# EAGLE board axiom_beta_sensor_cmv12000_v0.9 (EAGLE 7.0.0), part 1 of 2
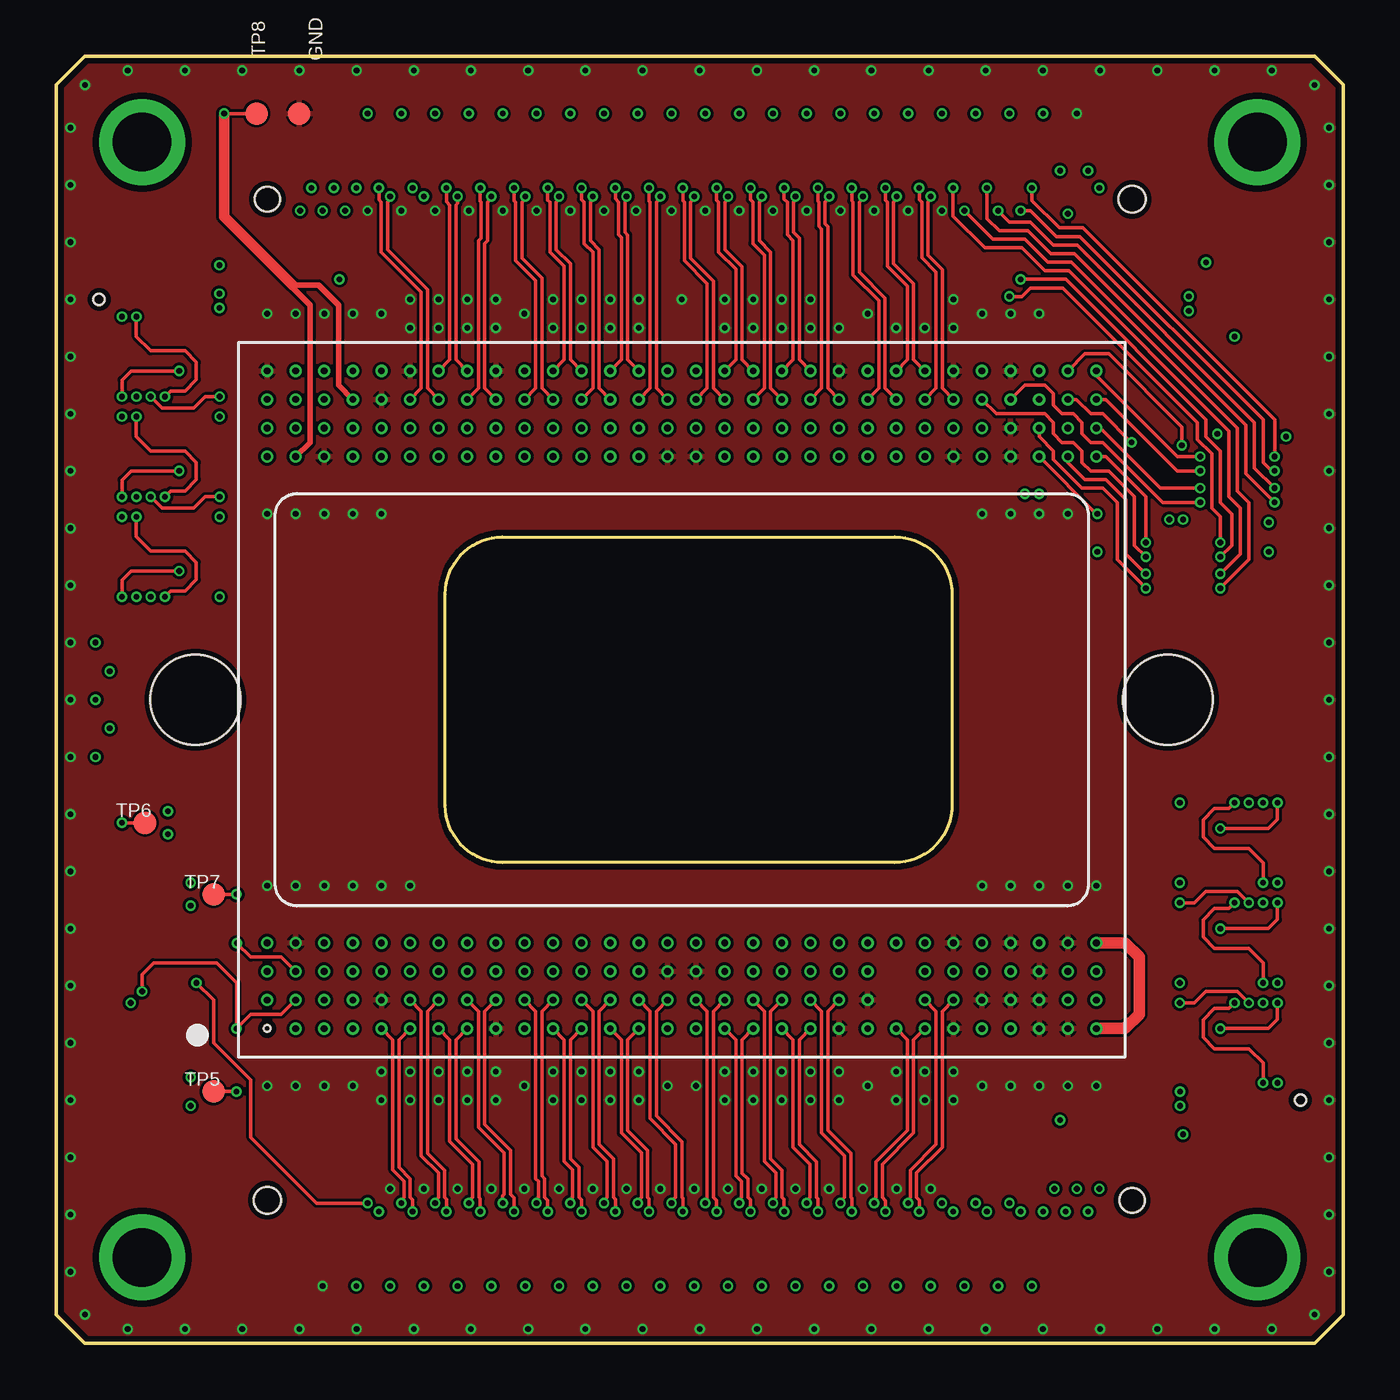
[diagram p0: board, top side]
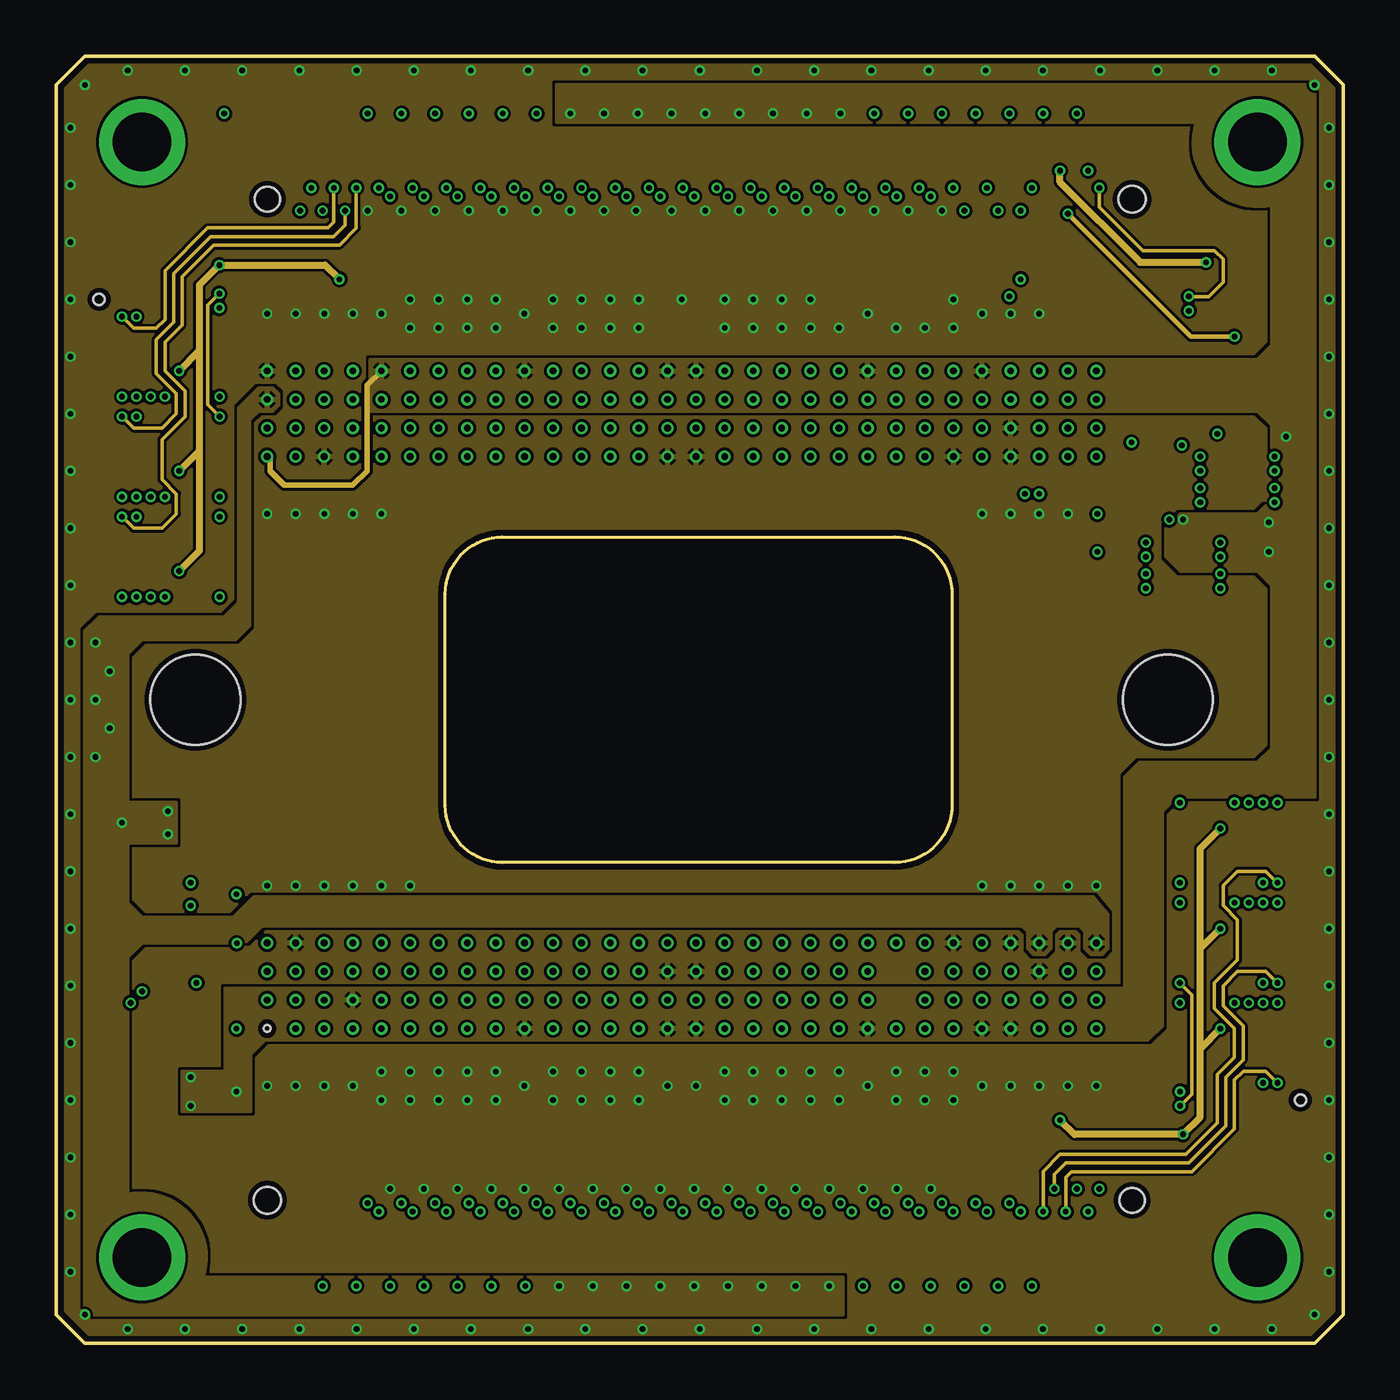
[diagram p1: board, inner layer Route2]
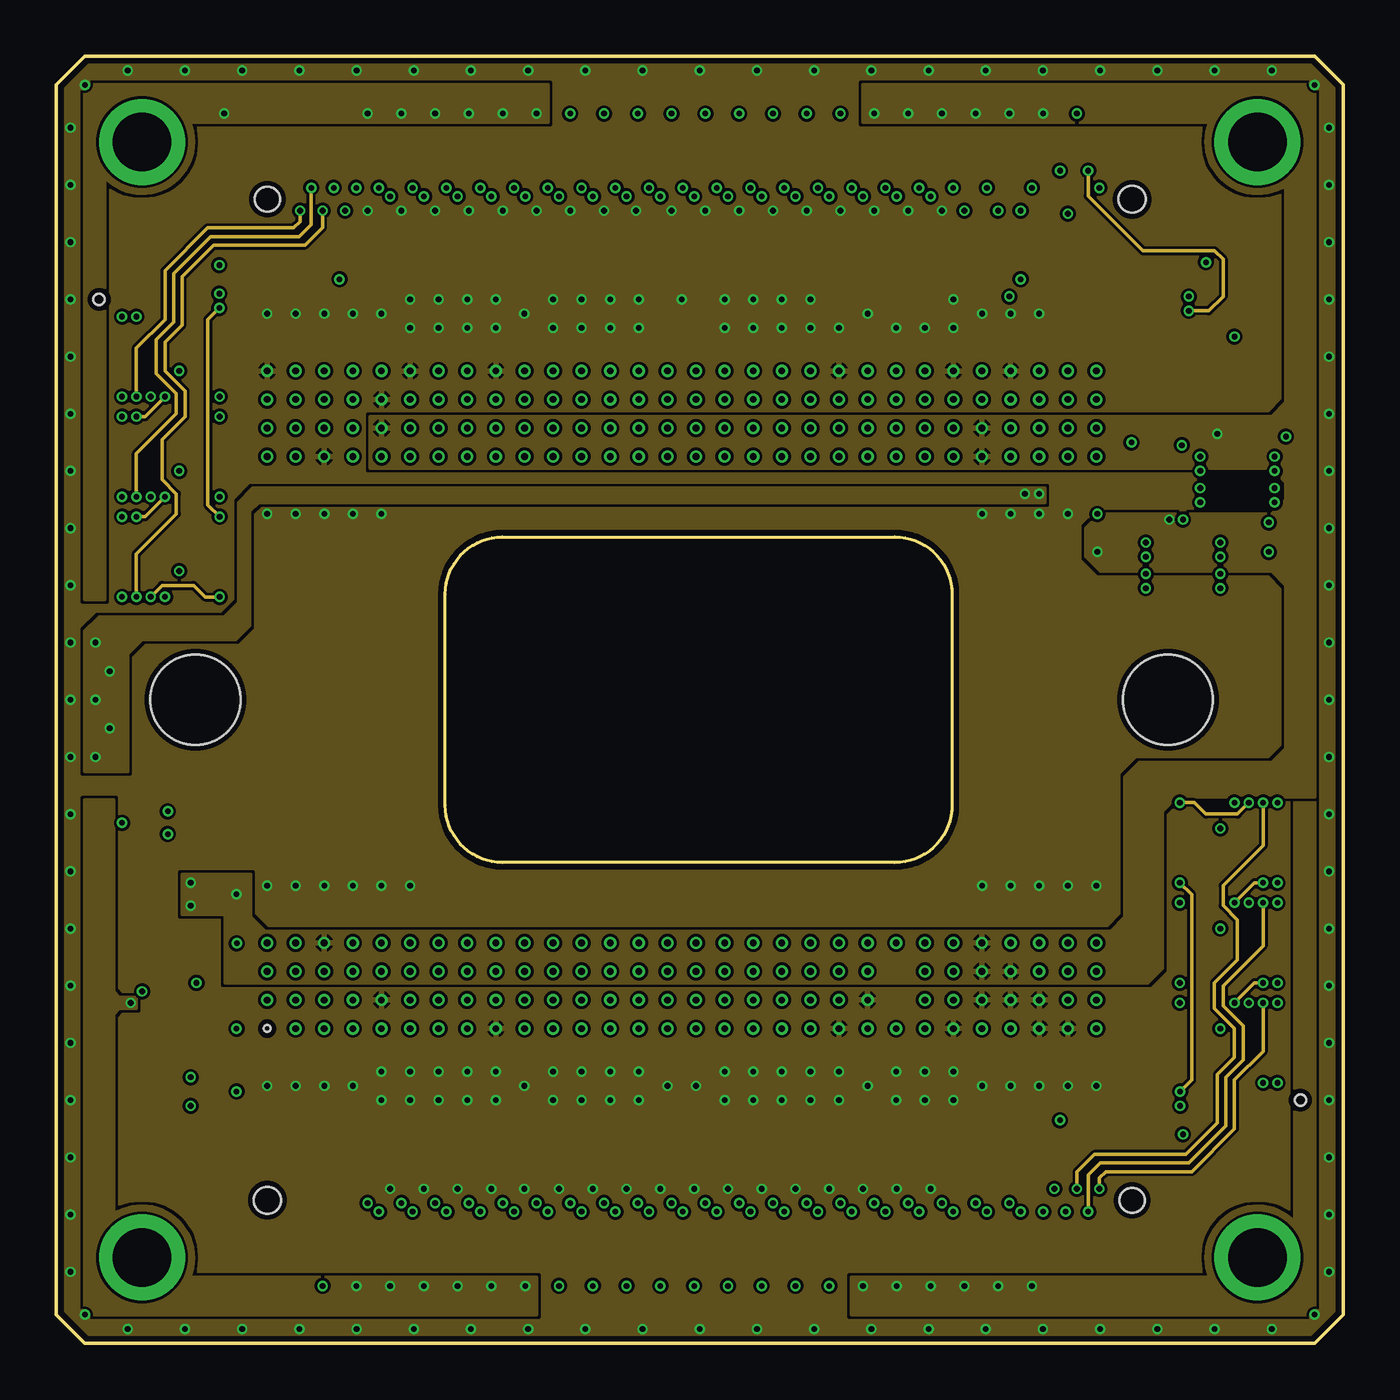
[diagram p2: board, inner layer Route15]
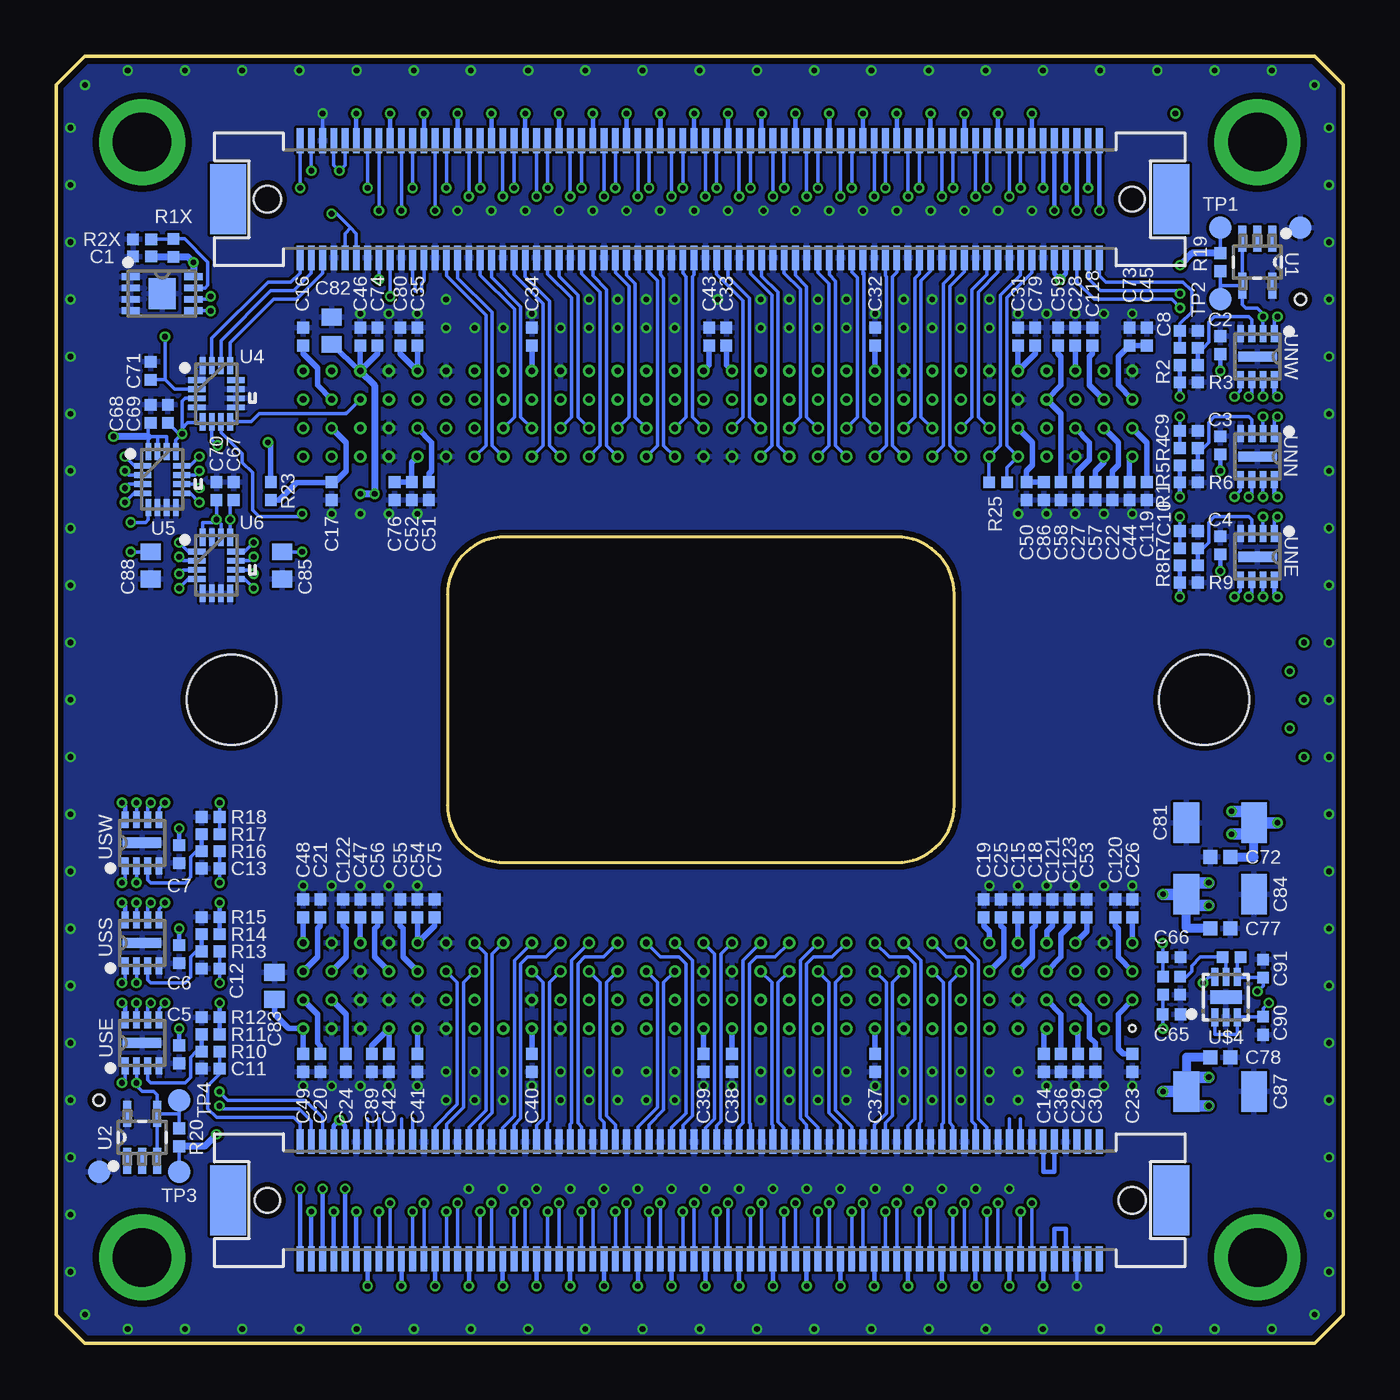
[diagram p3: board, bottom side, seen from below]

Size 57.15 x 57.15 mm. Coordinates in mm from the lower left corner, seen from the top.
Outline: 55.88,57.15 1.27,57.15 0,55.88 0,1.27 1.27,0 55.88,0 57.15,1.27 57.15,55.88 55.88,57.15
Outline: 37.23,21.34 19.81,21.34 arc-90 17.27,23.88 17.27,33.27 arc-90 19.81,35.8 37.23,35.8 arc-90 39.77,33.27 39.77,23.88 arc-90 37.23,21.34
Copper layers (1*2*15*16): Top 0.035559375mm / dielectric 0.17018125mm / Route2 0.01778125mm / dielectric 47mil / Route15 0.01778125mm / dielectric 0.17018125mm / Bottom 0.035559375mm
Design rules "axiom_beta_interface_OSHPark-4layer-tuned *": minimum track width 5mil, minimum drill 10mil, track to track 5mil, track to pad 5mil, pad to pad 5mil, via to via 5mil, smd to smd 5mil, copper to edge 10mil, drill to drill 6mil, minimum pad ring 4mil, minimum via ring 4mil, stop-mask expansion 2mil, vias tented up to drill 15mil, thermal gap 5mil
Net classes: 0 default: width 0.152 mm, drill 0.254 mm; 1 power: width 0.152 mm, drill 0.254 mm
Holes 4 mm at 49.36,28.57 6.18,28.57
Holes 0.5 mm at 1.9,46.36 55.25,10.79
bKeepout: area 1.4,24.8 to 13.4,32.4; area 43.9,24.8 to 56,32.4
tRestrict: area 51.1,1.6 to 55.5,6; area 1.6,51.1 to 6,55.5; area 51.1,51.1 to 55.5,55.5; area 1.6,1.6 to 6,6
bRestrict: area 51.1,1.6 to 55.5,6; area 1.6,51.1 to 6,55.5; area 51.1,51.1 to 55.5,55.5; area 1.6,1.6 to 6,6

## Footprints (pad centres in the part's own frame; a part is rotated, then mirrored left to right if it is on the bottom)
0402-C = smd 0.52 x 0.52: 1 -0.4,0; 2 0.4,0
0402-B = smd 0.62 x 0.62: 1 -0.45,0; 2 0.45,0
1206-B = smd 1.15 x 1.8: 1 -1.5,0; 2 1.5,0
0603-C = smd 0.75 x 0.9: 1 -0.6,0; 2 0.6,0
TP10R = smd 1 x 1: TP 0,0
SOT65P210X110-5N = smd 1.168 x 0.356: 1 -1.041,0.66; 2 -1.041,0; 3 -1.041,-0.66; 4 1.041,-0.66; 5 1.041,0.66
QFN40P185X265X55-16N = smd 0.762 x 0.254: 1 -0.864,0.61; 2 -0.864,0.203; 3 -0.864,-0.203; 4 -0.864,-0.61; 9 0.864,-0.61; 10 0.864,-0.203; 11 0.864,0.203; 12 0.864,0.61 | smd 0.254 x 0.762: 5 -0.61,-1.245; 6 -0.203,-1.245; 7 0.203,-1.245; 8 0.61,-1.245; 13 0.61,1.245; 14 0.203,1.245; 15 -0.203,1.245; 16 -0.61,1.245
10-30-07-237-400T4 = drill 0.3: A2 -17.945,-14.605; A3 -16.675,-14.605; A4 -15.405,-14.605; A5 -14.135,-14.605; A6 -12.865,-14.605; A7 -11.595,-14.605; A8 -10.325,-14.605; A9 -9.055,-14.605; A10 -7.785,-14.605; A11 -6.515,-14.605; A12 -5.245,-14.605; A13 -3.975,-14.605; A14 -2.705,-14.605; A15 -1.435,-14.605; A16 -0.165,-14.605; A17 1.105,-14.605; A18 2.375,-14.605; A19 3.645,-14.605; A20 4.915,-14.605; A21 6.185,-14.605; A22 7.455,-14.605; A23 8.725,-14.605; A24 9.995,-14.605; A25 11.265,-14.605; A26 12.535,-14.605; A27 13.805,-14.605; A28 15.075,-14.605; A29 16.345,-14.605; A30 17.615,-14.605; B1 -19.215,-13.335; B2 -17.945,-13.335; B3 -16.675,-13.335; B4 -15.405,-13.335; B5 -14.135,-13.335; B6 -12.865,-13.335; B7 -11.595,-13.335; B8 -10.325,-13.335; B9 -9.055,-13.335; B10 -7.785,-13.335; B11 -6.515,-13.335; B12 -5.245,-13.335; B13 -3.975,-13.335; B14 -2.705,-13.335; B15 -1.435,-13.335; B16 -0.165,-13.335; B17 1.105,-13.335; B18 2.375,-13.335; B19 3.645,-13.335; B20 4.915,-13.335; B21 6.185,-13.335; B22 7.455,-13.335; B24 9.995,-13.335; B25 11.265,-13.335; B26 12.535,-13.335; B27 13.805,-13.335; B28 15.075,-13.335; B29 16.345,-13.335; B30 17.615,-13.335; C1 -19.215,-12.065; C2 -17.945,-12.065; C3 -16.675,-12.065; C4 -15.405,-12.065; C5 -14.135,-12.065; C6 -12.865,-12.065; C7 -11.595,-12.065; C8 -10.325,-12.065; C9 -9.055,-12.065; C10 -7.785,-12.065; C11 -6.515,-12.065; C12 -5.245,-12.065; C13 -3.975,-12.065; C14 -2.705,-12.065; C15 -1.435,-12.065; C16 -0.165,-12.065; C17 1.105,-12.065; C18 2.375,-12.065; C19 3.645,-12.065; C20 4.915,-12.065; C21 6.185,-12.065; C22 7.455,-12.065; C24 9.995,-12.065; C25 11.265,-12.065; C26 12.535,-12.065; C27 13.805,-12.065; C28 15.075,-12.065; C29 16.345,-12.065; C30 17.615,-12.065; D1 -19.215,-10.795; D2 -17.945,-10.795; D3 -16.675,-10.795; D4 -15.405,-10.795; D5 -14.135,-10.795; D6 -12.865,-10.795; D7 -11.595,-10.795; D8 -10.325,-10.795; D9 -9.055,-10.795; D10 -7.785,-10.795; D11 -6.515,-10.795; D12 -5.245,-10.795; D13 -3.975,-10.795; D14 -2.705,-10.795; D15 -1.435,-10.795; D16 -0.165,-10.795; D17 1.105,-10.795; D18 2.375,-10.795; D19 3.645,-10.795; D20 4.915,-10.795; D21 6.185,-10.795; D22 7.455,-10.795; D23 8.725,-10.795; D24 9.995,-10.795; D25 11.265,-10.795; D26 12.535,-10.795; D27 13.805,-10.795; D28 15.075,-10.795; D29 16.345,-10.795; D30 17.615,-10.795; E1 -19.215,10.795; E2 -17.945,10.795; E3 -16.675,10.795; E4 -15.405,10.795; E5 -14.135,10.795; E6 -12.865,10.795; E7 -11.595,10.795; E8 -10.325,10.795; E9 -9.055,10.795; E10 -7.785,10.795; E11 -6.515,10.795; E12 -5.245,10.795; E13 -3.975,10.795; E14 -2.705,10.795; E15 -1.435,10.795; E16 -0.165,10.795; E17 1.105,10.795; E18 2.375,10.795; E19 3.645,10.795; E20 4.915,10.795; E21 6.185,10.795; E22 7.455,10.795; E23 8.725,10.795; E24 9.995,10.795; E25 11.265,10.795; E26 12.535,10.795; E27 13.805,10.795; E28 15.075,10.795; E29 16.345,10.795; E30 17.615,10.795; F1 -19.215,12.065; F2 -17.945,12.065; F3 -16.675,12.065; F4 -15.405,12.065; F5 -14.135,12.065; F6 -12.865,12.065; F7 -11.595,12.065; F8 -10.325,12.065; F9 -9.055,12.065; F10 -7.785,12.065; F11 -6.515,12.065; F12 -5.245,12.065; F13 -3.975,12.065; F14 -2.705,12.065; F15 -1.435,12.065; F16 -0.165,12.065; F17 1.105,12.065; F18 2.375,12.065; F19 3.645,12.065; F20 4.915,12.065; F21 6.185,12.065; F22 7.455,12.065; F23 8.725,12.065; F24 9.995,12.065; F25 11.265,12.065; F26 12.535,12.065; F27 13.805,12.065; F28 15.075,12.065; F29 16.345,12.065; F30 17.615,12.065; G1 -19.215,13.335; G2 -17.945,13.335; G3 -16.675,13.335; G4 -15.405,13.335; G5 -14.135,13.335; G6 -12.865,13.335; G7 -11.595,13.335; G8 -10.325,13.335; G9 -9.055,13.335; G10 -7.785,13.335; G11 -6.515,13.335; G12 -5.245,13.335; G13 -3.975,13.335; G14 -2.705,13.335; G15 -1.435,13.335; G16 -0.165,13.335; G17 1.105,13.335; G18 2.375,13.335; G19 3.645,13.335; G20 4.915,13.335; G21 6.185,13.335; G22 7.455,13.335; G23 8.725,13.335; G24 9.995,13.335; G25 11.265,13.335; G26 12.535,13.335; G27 13.805,13.335; G28 15.075,13.335; G29 16.345,13.335; G30 17.615,13.335; H1 -19.215,14.605; H2 -17.945,14.605; H3 -16.675,14.605; H4 -15.405,14.605; H5 -14.135,14.605; H6 -12.865,14.605; H7 -11.595,14.605; H8 -10.325,14.605; H9 -9.055,14.605; H10 -7.785,14.605; H11 -6.515,14.605; H12 -5.245,14.605; H13 -3.975,14.605; H14 -2.705,14.605; H15 -1.435,14.605; H16 -0.165,14.605; H17 1.105,14.605; H18 2.375,14.605; H19 3.645,14.605; H20 4.915,14.605; H21 6.185,14.605; H22 7.455,14.605; H23 8.725,14.605; H24 9.995,14.605; H25 11.265,14.605; H26 12.535,14.605; H27 13.805,14.605; H28 15.075,14.605; H29 16.345,14.605; H30 17.615,14.605 | hole 0.3: -19.215,-14.605
MLF-6 = smd 0.3 x 0.8: 1 -0.5,-0.9; 2 0,-0.9; 3 0.5,-0.9; 4 0.5,0.9; 5 0,0.9; 6 -0.5,0.9 | smd 1.4 x 0.6: EP 0,0
DFN200X300X100-9N = smd 0.813 x 0.305: 1 -1.397,0.762; 2 -1.397,0.254; 3 -1.397,-0.254; 4 -1.397,-0.762; 5 1.397,-0.762; 6 1.397,-0.254; 7 1.397,0.254; 8 1.397,0.762 | smd 1.194 x 1.397: EP 0,0
DFN200X200X100-9N = smd 0.75 x 0.3: 1 -1.025,0.75; 2 -1.025,0.25; 3 -1.025,-0.25; 4 -1.025,-0.75; 5 1.025,-0.75; 6 1.025,-0.25; 7 1.025,0.25; 8 1.025,0.75 | smd 0.45 x 1.7: EP 0,0
FX10A-144P = smd 0.3 x 1.1: 1 -17.75,-2.6; 2 -17.75,2.6; 3 -17.25,-2.6; 4 -17.25,2.6; 5 -16.75,-2.6; 6 -16.75,2.6; 7 -16.25,-2.6; 8 -16.25,2.6; 9 -15.75,-2.6; 10 -15.75,2.6; 11 -15.25,-2.6; 12 -15.25,2.6; 13 -14.75,-2.6; 14 -14.75,2.6; 15 -14.25,-2.6; 16 -14.25,2.6; 17 -13.75,-2.6; 18 -13.75,2.6; 19 -13.25,-2.6; 20 -13.25,2.6; 21 -12.75,-2.6; 22 -12.75,2.6; 23 -12.25,-2.6; 24 -12.25,2.6; 25 -11.75,-2.6; 26 -11.75,2.6; 27 -11.25,-2.6; 28 -11.25,2.6; 29 -10.75,-2.6; 30 -10.75,2.6; 31 -10.25,-2.6; 32 -10.25,2.6; 33 -9.75,-2.6; 34 -9.75,2.6; 35 -9.25,-2.6; 36 -9.25,2.6; 37 -8.75,-2.6; 38 -8.75,2.6; 39 -8.25,-2.6; 40 -8.25,2.6; 41 -7.75,-2.6; 42 -7.75,2.6; 43 -7.25,-2.6; 44 -7.25,2.6; 45 -6.75,-2.6; 46 -6.75,2.6; 47 -6.25,-2.6; 48 -6.25,2.6; 49 -5.75,-2.6; 50 -5.75,2.6; 51 -5.25,-2.6; 52 -5.25,2.6; 53 -4.75,-2.6; 54 -4.75,2.6; 55 -4.25,-2.6; 56 -4.25,2.6; 57 -3.75,-2.6; 58 -3.75,2.6; 59 -3.25,-2.6; 60 -3.25,2.6; 61 -2.75,-2.6; 62 -2.75,2.6; 63 -2.25,-2.6; 64 -2.25,2.6; 65 -1.75,-2.6; 66 -1.75,2.6; 67 -1.25,-2.6; 68 -1.25,2.6; 69 -0.75,-2.6; 70 -0.75,2.6; 71 -0.25,-2.6; 72 -0.25,2.6; 73 0.25,-2.6; 74 0.25,2.6; 75 0.75,-2.6; 76 0.75,2.6; 77 1.25,-2.6; 78 1.25,2.6; 79 1.75,-2.6; 80 1.75,2.6; 81 2.25,-2.6; 82 2.25,2.6; 83 2.75,-2.6; 84 2.75,2.6; 85 3.25,-2.6; 86 3.25,2.6; 87 3.75,-2.6; 88 3.75,2.6; 89 4.25,-2.6; 90 4.25,2.6; 91 4.75,-2.6; 92 4.75,2.6; 93 5.25,-2.6; 94 5.25,2.6; 95 5.75,-2.6; 96 5.75,2.6; 97 6.25,-2.6; 98 6.25,2.6; 99 6.75,-2.6; 100 6.75,2.6; 101 7.25,-2.6; 102 7.25,2.6; 103 7.75,-2.6; 104 7.75,2.6; 105 8.25,-2.6; 106 8.25,2.6; 107 8.75,-2.6; 108 8.75,2.6; 109 9.25,-2.6; 110 9.25,2.6; 111 9.75,-2.6; 112 9.75,2.6; 113 10.25,-2.6; 114 10.25,2.6; 115 10.75,-2.6; 116 10.75,2.6; 117 11.25,-2.6; 118 11.25,2.6; 119 11.75,-2.6; 120 11.75,2.6; 121 12.25,-2.6; 122 12.25,2.6; 123 12.75,-2.6; 124 12.75,2.6; 125 13.25,-2.6; 126 13.25,2.6; 127 13.75,-2.6; 128 13.75,2.6; 129 14.25,-2.6; 130 14.25,2.6; 131 14.75,-2.6; 132 14.75,2.6; 133 15.25,-2.6; 134 15.25,2.6; 135 15.75,-2.6; 136 15.75,2.6; 137 16.25,-2.6; 138 16.25,2.6; 139 16.75,-2.6; 140 16.75,2.6; 141 17.25,-2.6; 142 17.25,2.6; 143 17.75,-2.6; 144 17.75,2.6 | smd 1.6 x 3.1: M1 -20.95,0; M2 20.95,0 | hole 1.1: -19.2,0 | hole 1.2: 19.2,0

## Placement (x,y rotation side)
C1  100n  [0402-C]  53.34,48.26 180 bottom
C2  100n  [0402-C]  5.46,44.32 90 bottom
C3  100n  [0402-C]  5.46,39.88 90 bottom
C4  100n  [0402-C]  5.46,35.43 90 bottom
C5  100n  [0402-C]  51.69,12.83 270 bottom
C6  100n  [0402-C]  51.69,17.27 270 bottom
C7  100n  [0402-C]  51.69,21.72 270 bottom
C8  1µ  [0402-C]  6.86,44.96 0 bottom
C9  1µ  [0402-C]  6.86,40.51 0 bottom
C10  1µ  [0402-C]  6.86,36.07 0 bottom
C11  1µ  [0402-C]  50.29,12.19 180 bottom
C12  1µ  [0402-C]  50.29,16.64 180 bottom
C13  1µ  [0402-C]  50.29,21.08 180 bottom
C14  100n  [0402-C]  13.3,12.45 270 bottom
C15  100n  [0402-C]  14.44,19.3 90 bottom
C16  100n  [0402-C]  46.19,44.7 90 bottom
C17  100n  [0402-C]  44.92,37.85 270 bottom
C18  100n  [0402-C]  13.68,19.3 90 bottom
C19  100n  [0402-C]  15.96,19.3 90 bottom
C20  100n  [0402-C]  45.43,12.45 270 bottom
C21  100n  [0402-C]  45.43,19.3 90 bottom
C22  100n  [0402-C]  10.25,37.85 90 bottom
C23  100n  [0402-C]  9.36,12.45 90 bottom
C24  100n  [0402-C]  44.28,12.45 90 bottom
C25  100n  [0402-C]  15.2,19.3 270 bottom
C26  100n  [0402-C]  9.36,19.3 270 bottom
C27  100n  [0402-C]  11.77,37.85 90 bottom
C28  100n  [0402-C]  11.9,44.7 270 bottom
C29  100n  [0402-C]  11.77,12.45 270 bottom
C30  100n  [0402-C]  11.01,12.45 270 bottom
C31  100n  [0402-C]  14.44,44.7 90 bottom
C32  100n  [0402-C]  20.79,44.7 90 bottom
C33  100n  [0402-C]  27.39,44.7 90 bottom
C34  100n  [0402-C]  36.03,44.7 90 bottom
C35  100n  [0402-C]  41.11,44.7 90 bottom
C36  100n  [0402-C]  12.54,12.45 270 bottom
C37  100n  [0402-C]  20.79,12.45 270 bottom
C38  100n  [0402-C]  27.14,12.45 270 bottom
C39  100n  [0402-C]  28.41,12.45 270 bottom
C40  100n  [0402-C]  36.03,12.45 270 bottom
C41  100n  [0402-C]  41.11,12.45 270 bottom
C42  100n  [0402-C]  42.38,12.45 270 bottom
C43  100n  [0402-C]  28.16,44.7 90 bottom
C44  100n  [0402-C]  9.49,37.85 270 bottom
C45  100n  [0402-C]  8.72,44.7 90 bottom
C46  100n  [0402-C]  43.65,44.7 90 bottom
C47  100n  [0402-C]  43.65,19.3 90 bottom
C48  100n  [0402-C]  46.19,19.3 90 bottom
C49  100n  [0402-C]  46.19,12.45 270 bottom
C50  100n  [0402-C]  14.06,37.85 270 bottom
C51  100n  [0402-C]  40.6,37.85 270 bottom
C52  100n  [0402-C]  41.36,37.85 270 bottom
C53  100n  [0402-C]  11.39,19.3 90 bottom
C54  100n  [0402-C]  41.11,19.3 90 bottom
C55  100n  [0402-C]  41.87,19.3 90 bottom
C56  100n  [0402-C]  42.89,19.3 90 bottom
C57  100n  [0402-C]  11.01,37.85 270 bottom
C58  100n  [0402-C]  12.54,37.85 270 bottom
C59  4µ7  [0402-C]  12.66,44.7 90 bottom
C65  100n  [0402-C]  7.62,14.6 0 bottom
C66  100n  [0402-C]  7.62,17.14 0 bottom
C67  100n  [0402-C]  49.28,37.85 90 bottom
C68  100n  [0402-C]  52.96,41.27 90 bottom
C69  100n  [0402-C]  52.2,41.27 90 bottom
C70  100n  [0402-C]  50.04,37.85 90 bottom
C71  100n  [0402-C]  52.96,43.18 90 bottom
C72  4µ7  [0402-B]  5.46,21.59 180 bottom
C73  4µ7  [0402-C]  9.49,44.7 90 bottom
C74  4µ7  [0402-C]  42.89,44.7 90 bottom
C75  4µ7  [0402-C]  40.35,19.3 90 bottom
C76  4µ7  [0402-C]  42.13,37.85 270 bottom
C77  4µ7  [0402-B]  5.46,18.41 0 bottom
C78  4µ7  [0402-B]  5.46,12.7 0 bottom
C79  4µ7  [0402-C]  13.68,44.7 90 bottom
C80  4µ7  [0402-C]  41.87,44.7 90 bottom
C81  100µ  [1206-B]  5.46,23.11 180 bottom
C82  10µ  [0603-C]  44.92,44.96 90 bottom
C83  10µ  [0603-C]  47.46,15.88 90 bottom
C84  100µ  [1206-B]  5.46,19.94 0 bottom
C85  10µ  [0603-C]  47.12,34.54 270 bottom
C86  4µ7  [0402-C]  13.3,37.85 270 bottom
C87  100µ  [1206-B]  5.46,11.18 0 bottom
C88  10µ  [0603-C]  52.96,34.54 270 bottom
C89  4µ7  [0402-C]  43.14,12.45 270 bottom
C90  4µ7  [0402-C]  3.56,14.1 270 bottom
C91  4µ7  [0402-C]  3.56,16.64 270 bottom
C118  100n  [0402-C]  11.14,44.7 90 bottom
C119  100n  [0402-C]  8.72,37.85 270 bottom
C120  100n  [0402-C]  10.12,19.3 90 bottom
C121  100n  [0402-C]  12.92,19.3 90 bottom
C122  100n  [0402-C]  44.41,19.3 90 bottom
C123  100n  [0402-C]  12.15,19.3 90 bottom
GND  TPTP10R  [TP10R]  10.79,54.61 0 top
GND75  TPTP10R  [TP10R]  1.9,49.53 180 bottom
GND77  TPTP10R  [TP10R]  55.25,7.62 180 bottom
PARALLELLA  [PARALLELLA-FRAME]  28.57,28.57 0 top
R1  [0402-C]  6.86,44.2 0 bottom
R1X  [0402-C]  51.94,48.64 90 bottom
R2  [0402-C]  6.86,43.43 180 bottom
R2X  [0402-C]  53.34,49.02 180 bottom
R3  [0402-C]  6.86,42.67 0 bottom
R4  [0402-C]  6.86,39.75 0 bottom
R5  [0402-C]  6.86,38.99 180 bottom
R6  [0402-C]  6.86,38.23 0 bottom
R7  [0402-C]  6.86,35.31 0 bottom
R8  [0402-C]  6.86,34.54 180 bottom
R9  [0402-C]  6.86,33.78 0 bottom
R10  [0402-C]  50.29,12.95 180 bottom
R11  [0402-C]  50.29,13.72 0 bottom
R12  [0402-C]  50.29,14.48 180 bottom
R13  [0402-C]  50.29,17.4 180 bottom
R14  [0402-C]  50.29,18.16 0 bottom
R15  [0402-C]  50.29,18.92 180 bottom
R16  [0402-C]  50.29,21.84 180 bottom
R17  [0402-C]  50.29,22.61 0 bottom
R18  [0402-C]  50.29,23.37 180 bottom
R19  [0402-C]  5.46,48.01 270 bottom
R20  [0402-C]  51.69,9.14 90 bottom
R21  [0402-C]  4.95,17.14 0 bottom
R22  [0402-C]  7.24,15.88 90 bottom
R23  [0402-C]  47.62,37.85 270 bottom
R24  [0402-C]  8,15.88 90 bottom
R25  [0402-C]  15.33,38.23 180 bottom
TP1  TPTP10R  [TP10R]  5.46,49.53 0 bottom
TP2  TPTP10R  [TP10R]  5.46,46.36 0 bottom
TP3  TPTP10R  [TP10R]  51.69,7.62 0 bottom
TP4  TPTP10R  [TP10R]  51.69,10.79 0 bottom
TP5  TPTP10R  [TP10R]  6.98,11.18 0 top
TP6  TPTP10R  [TP10R]  3.94,23.11 0 top
TP7  TPTP10R  [TP10R]  6.98,19.94 0 top
TP8  TPTP10R  [TP10R]  8.89,54.61 0 top
U1  TLV431ACDCKR  [SOT65P210X110-5N]  3.81,48.01 270 bottom
U2  TLV431ACDCKR  [SOT65P210X110-5N]  53.34,9.14 90 bottom
U4  SN74AVC4T245RSV  [QFN40P185X265X55-16N]  50.04,42.16 0 bottom
U5  SN74AVC4T774RSV  [QFN40P185X265X55-16N]  52.45,38.35 0 bottom
U6  SN74AVC4T774RSV  [QFN40P185X265X55-16N]  50.04,34.54 0 bottom
U$1  [µZ-FRAME]  28.57,28.57 0 top
U$2  CMV12000ANDON  [10-30-07-237-400T4]  28.57,28.57 0 top
U$4  MIC47050  [MLF-6]  5.21,15.37 0 bottom
UEP  BR24G04NUX  [DFN200X300X100-9N]  52.45,46.61 0 bottom
UNE  TS332IQ2T  [DFN200X200X100-9N]  3.81,34.92 270 bottom
UNN  TS332IQ2T  [DFN200X200X100-9N]  3.81,39.37 270 bottom
UNW  TS332IQ2T  [DFN200X200X100-9N]  3.81,43.81 270 bottom
USE  TS332IQ2T  [DFN200X200X100-9N]  53.34,13.33 90 bottom
USS  TS332IQ2T  [DFN200X200X100-9N]  53.34,17.78 90 bottom
USW  TS332IQ2T  [DFN200X200X100-9N]  53.34,22.23 90 bottom
X-NORTH  FX10-144P  [FX10A-144P]  28.57,50.8 180 bottom
X-SOUTH  FX10-144P  [FX10A-144P]  28.57,6.35 0 bottom

## Library data of the parts
C1-C59 C65-C91 C118-C123 R1 R1X R2 R2X R3-R25 = generic-rcl
GND GND75 GND77 TP1-TP8 = testpad
PARALLELLA = parallella
U1 U2 = vref
U4-U6 = lvltrans
U$1 = microzed
U$2 = cmosis
U$4 = ldo
UEP = eeprom
UNE UNN UNW USE USS USW = comparator
X-NORTH X-SOUTH = fx10

## Nets
CLK_IN: U6.12 U$2.E30
FRAME_REQ: U5.11 U$2.G30
GND: C1.2 C2.2 C3.2 C4.2 C5.2 C6.2 C7.2 C8.2 C9.2 C10.2 C11.2 C12.2 C13.2 C14.2 C15.2 C16.2 C17.2 C18.2 C19.2 C20.2 C21.2 C22.1 C23.1 C24.1 C25.1 C26.1 C27.1 C28.1 C29.2 C30.2 C31.2 C32.2 C33.2 C34.2 C35.2 C36.2 C37.2 C38.2 C39.2 C40.2 C41.2 C42.2 C43.2 C44.2 C45.2 C46.2 C47.2 C48.2 C49.2 C50.2 C51.2 C52.2 C53.2 C54.2 C55.2 C56.2 C57.2 C58.2 C59.2 C65.2 C66.2 C67.2 C68.2 C69.2 C70.2 C71.2 C72.2 C73.2 C74.2 C75.2 C76.2 C77.2 C78.2 C79.2 C80.2 C81.2 C82.2 C83.2 C84.2 C85.2 C86.2 C87.2 C88.2 C89.2 C90.2 C91.1 C118.2 C119.2 C120.2 C121.2 C122.2 C123.2 GND75.TP GND77.TP GND.TP R2X.2 R3.2 R6.2 R9.2 R12.2 R15.2 R18.2 R22.1 U1.5 U2.5 U4.1 U4.4 U4.9 U4.10 U4.11 U4.16 U5.6 U5.7 U5.8 U6.5 U6.6 U6.7 U6.8 U6.15 U$2.A9 U$2.A21 U$2.A25 U$2.A28 U$2.A29 U$2.B5 U$2.B22 U$2.B26 U$2.B27 U$2.B28 U$2.C15 U$2.C16 U$2.C28 U$2.D2 U$2.D25 U$2.D27 U$2.D29 U$2.E3 U$2.E15 U$2.E16 U$2.E25 U$2.E27 U$2.F27 U$2.G5 U$2.H1 U$2.H6 U$2.H9 U$2.H21 U$2.H25 U$2.H27 U$4.2 U$4.EP UEP.1 UEP.2 UEP.3 UEP.4 UEP.EP UNE.4 UNE.EP UNN.4 UNN.EP UNW.4 UNW.EP USE.4 USE.EP USS.4 USS.EP USW.4 USW.EP X-NORTH.12 X-NORTH.18 X-NORTH.24 X-NORTH.30 X-NORTH.36 X-NORTH.42 X-NORTH.48 X-NORTH.54 X-NORTH.60 X-NORTH.66 X-NORTH.72 X-NORTH.78 X-NORTH.84 X-NORTH.90 X-NORTH.96 X-NORTH.102 X-NORTH.108 X-NORTH.114 X-NORTH.120 X-NORTH.126 X-NORTH.132 X-NORTH.138 X-NORTH.139 X-SOUTH.12 X-SOUTH.18 X-SOUTH.24 X-SOUTH.30 X-SOUTH.36 X-SOUTH.42 X-SOUTH.48 X-SOUTH.54 X-SOUTH.60 X-SOUTH.66 X-SOUTH.72 X-SOUTH.78 X-SOUTH.84 X-SOUTH.90 X-SOUTH.96 X-SOUTH.102 X-SOUTH.108 X-SOUTH.114 X-SOUTH.120 X-SOUTH.126 X-SOUTH.132 X-SOUTH.138 X-SOUTH.139
N00_N: R25.2 U$2.E6 X-NORTH.16
N00_P: R25.1 U$2.E5 X-NORTH.14
N01_N: U$2.G7 X-NORTH.17
N01_P: U$2.G6 X-NORTH.15
N02_N: U$2.F7 X-NORTH.22
N02_P: U$2.F6 X-NORTH.20
N03_N: X-NORTH.23
N03_P: X-NORTH.21
N04_N: U$2.E8 X-NORTH.28
N04_P: U$2.E7 X-NORTH.26
N05_N: U$2.H8 X-NORTH.29
N05_P: U$2.H7 X-NORTH.27
N06_N: U$2.F9 X-NORTH.34
N06_P: U$2.F8 X-NORTH.32
N07_N: U$2.G9 X-NORTH.35
N07_P: U$2.G8 X-NORTH.33
N08_N: U$2.E10 X-NORTH.40
N08_P: U$2.E9 X-NORTH.38
N09_N: U$2.G11 X-NORTH.41
N09_P: U$2.G10 X-NORTH.39
N10_N: U$2.F11 X-NORTH.46
N10_P: U$2.F10 X-NORTH.44
N11_N: U$2.H12 X-NORTH.47
N11_P: U$2.H11 X-NORTH.45
N12_N: U$2.E12 X-NORTH.52
N12_P: U$2.E11 X-NORTH.50
N13_N: U$2.G13 X-NORTH.53
N13_P: U$2.G12 X-NORTH.51
N14_N: U$2.F13 X-NORTH.58
N14_P: U$2.F12 X-NORTH.56
N15_N: U$2.H14 X-NORTH.59
N15_P: U$2.H13 X-NORTH.57
N16_N: U$2.E14 X-NORTH.64
N16_P: U$2.E13 X-NORTH.62
N17_N: U$2.G15 X-NORTH.65
N17_P: U$2.G14 X-NORTH.63
N18_N: U$2.F15 X-NORTH.70
N18_P: U$2.F14 X-NORTH.68
N19_N: U$2.G17 X-NORTH.71
N19_P: U$2.G16 X-NORTH.69
N20_N: U$2.F17 X-NORTH.76
N20_P: U$2.F16 X-NORTH.74
N21_N: U$2.H18 X-NORTH.77
N21_P: U$2.H17 X-NORTH.75
N22_N: U$2.E18 X-NORTH.82
N22_P: U$2.E17 X-NORTH.80
N23_N: U$2.G19 X-NORTH.83
N23_P: U$2.G18 X-NORTH.81
N24_N: U$2.F19 X-NORTH.88
N24_P: U$2.F18 X-NORTH.86
N25_N: U$2.H20 X-NORTH.89
N25_P: U$2.H19 X-NORTH.87
N26_N: U$2.E20 X-NORTH.94
N26_P: U$2.E19 X-NORTH.92
N27_N: U$2.G21 X-NORTH.95
N27_P: U$2.G20 X-NORTH.93
N28_N: U$2.F21 X-NORTH.100
N28_P: U$2.F20 X-NORTH.98
N29_N: U$2.G23 X-NORTH.101
N29_P: U$2.G22 X-NORTH.99
N30_N: U$2.E22 X-NORTH.106
N30_P: U$2.E21 X-NORTH.104
N31_N: U$2.H24 X-NORTH.107
N31_P: U$2.H23 X-NORTH.105
N32_N: U$2.F23 X-NORTH.112
N32_P: U$2.F22 X-NORTH.110
N33_N: U$2.G25 X-NORTH.113
N33_P: U$2.G24 X-NORTH.111
N34_N: U$2.E24 X-NORTH.118
N34_P: U$2.E23 X-NORTH.116
N35_N: U6.4 X-NORTH.119
N35_P: U6.3 X-NORTH.117
N36_N: X-NORTH.124
N36_P: X-NORTH.122
N37_N: U5.3 X-NORTH.125
N37_P: U5.4 X-NORTH.123
N38_N: U6.2 X-NORTH.130
N38_P: U6.1 X-NORTH.128
N39_N: U5.1 X-NORTH.131
N39_P: U5.2 X-NORTH.129
N$1: R1X.2 R2X.1 UEP.7
N$5: C118.1 U$2.G2
N$6: C119.1 U$2.F1
N$11: C120.1 U$2.C1
N$12: C121.1 U$2.D4
N$15: C122.1 U$2.C29
N$16: C123.1 U$2.C4
N$17: C14.1 U$2.A4
N$18: C15.1 U$2.D5
N$19: R21.1 R22.2 U$4.5
N$21: C18.1 U$2.C5
N$22: C19.1 U$2.D6
N$23: C20.1 U$2.B30
N$24: C21.1 U$2.C30
N$25: C22.2 U$2.F2
N$26: C23.2 U$2.B1
N$27: C24.2 U$2.B29
N$28: C25.2 U$2.C6
N$29: C26.2 U$2.D1
N$30: C27.2 U$2.F3
N$31: C28.2 U$2.H3
N$32: C29.1 U$2.A3
N$33: C30.1 U$2.B3
N$38: U$2.F4
N$39: U$2.E4
N$40: U$2.H4
N$41: U$2.G3
N$42: U$2.A2
N$172: R11.2 R12.1 USE.6
N$173: R5.2 R6.1 UNN.6
N$182: R8.2 R9.1 UNE.6
N$183: R10.2 R11.1 USE.3
N$188: R7.2 R8.1 UNE.3
N$191: R1.2 R2.1 UNW.3
N$192: R2.2 R3.1 UNW.6
N$193: R14.2 R15.1 USS.6
N$194: R13.2 R14.1 USS.3
N$195: R16.2 R17.1 USW.3
N$196: R17.2 R18.1 USW.6
N_CHK_V: C2.1 C3.1 C4.1 R19.1 TP1.TP UNE.8 UNN.8 UNW.8 X-NORTH.8 X-NORTH.10
N_I2C_V: C1.1 R1X.1 UEP.8 X-NORTH.135 X-NORTH.137
N_REF: R19.2 TP2.TP U1.3 U1.4 UNE.2 UNE.5 UNN.2 UNN.5 UNW.2 UNW.5
N_SCK: U4.15 X-NORTH.144
N_SCL: UEP.6 X-NORTH.143
N_SDA: UEP.5 X-NORTH.141
N_SDI: U4.13 X-NORTH.140
N_SDO: U4.14 X-NORTH.142
N_SPI_V: C71.1 U4.2 X-NORTH.134 X-NORTH.136
N_VE: C50.1 C51.1 C52.1 C53.1 C54.1 C55.1 C56.1 C67.1 C69.1 C75.1 C76.1 C77.1 C84.1 C85.1 C86.1 TP7.TP U4.3 U4.5 U5.13 U6.13 U$2.C26 U$2.C27 U$2.D3 U$2.D26 U$2.E26 U$2.F5 U$2.F26 X-NORTH.103 X-NORTH.109 X-NORTH.115 X-NORTH.121 X-NORTH.127 X-NORTH.133
N_VE_CV: C10.1 R7.1 X-NORTH.6
N_VE_OV: UNE.7 X-NORTH.5
N_VE_UV: UNE.1 X-NORTH.11
N_VN: C31.1 C32.1 C33.1 C34.1 C35.1 C36.1 C37.1 C38.1 C39.1 C40.1 C41.1 C42.1 C43.1 C44.1 C68.1 C70.1 C78.1 C79.1 C80.1 C87.1 C88.1 C89.1 TP5.TP U5.5 U5.14 U5.15 U5.16 U6.14 U6.16 U$2.A10 U$2.A15 U$2.A16 U$2.A22 U$2.A26 U$2.A27 U$2.B4 U$2.E1 U$2.H5 U$2.H10 U$2.H15 U$2.H16 U$2.H22 U$2.H26 X-NORTH.49 X-NORTH.55 X-NORTH.61 X-NORTH.67 X-NORTH.73 X-NORTH.79 X-NORTH.85 X-NORTH.91 X-NORTH.97
N_VN_CV: C9.1 R4.1 X-NORTH.4
N_VN_OV: UNN.7 X-NORTH.3
N_VN_UV: UNN.1 X-NORTH.9
N_VW: C57.1 C58.1 C59.1 TP8.TP U$2.E2 U$2.G4 X-NORTH.13 X-NORTH.19 X-NORTH.25 X-NORTH.31 X-NORTH.37 X-NORTH.43
N_VW_CV: C8.1 R1.1 X-NORTH.2
N_VW_OV: UNW.7 X-NORTH.1
N_VW_UV: UNW.1 X-NORTH.7
R5: R4.2 R5.1 UNN.3
S00_N: X-SOUTH.16
S00_P: X-SOUTH.14
S01_N: X-SOUTH.17
S01_P: X-SOUTH.15
S02_N: X-SOUTH.22
S02_P: X-SOUTH.20
S03_N: X-SOUTH.23
S03_P: X-SOUTH.21
S04_N: U$2.C24 X-SOUTH.28
S04_P: U$2.C25 X-SOUTH.26
S05_N: X-SOUTH.29
S05_P: X-SOUTH.27
S06_N: U$2.D23 X-SOUTH.34
S06_P: U$2.D24 X-SOUTH.32
S07_N: U$2.B24 X-SOUTH.35
S07_P: U$2.B25 X-SOUTH.33
S08_N: U$2.D21 X-SOUTH.40
S08_P: U$2.D22 X-SOUTH.38
S09_N: U$2.A23 X-SOUTH.41
S09_P: U$2.A24 X-SOUTH.39
S10_N: U$2.C21 X-SOUTH.46
S10_P: U$2.C22 X-SOUTH.44
S11_N: U$2.B20 X-SOUTH.47
S11_P: U$2.B21 X-SOUTH.45
S12_N: U$2.D19 X-SOUTH.52
S12_P: U$2.D20 X-SOUTH.50
S13_N: U$2.A19 X-SOUTH.53
S13_P: U$2.A20 X-SOUTH.51
S14_N: U$2.C19 X-SOUTH.58
S14_P: U$2.C20 X-SOUTH.56
S15_N: U$2.B18 X-SOUTH.59
S15_P: U$2.B19 X-SOUTH.57
S16_N: U$2.C17 X-SOUTH.64
S16_P: U$2.C18 X-SOUTH.62
S17_N: U$2.A17 X-SOUTH.65
S17_P: U$2.A18 X-SOUTH.63
S18_N: U$2.D17 X-SOUTH.70
S18_P: U$2.D18 X-SOUTH.68
S19_N: U$2.B16 X-SOUTH.71
S19_P: U$2.B17 X-SOUTH.69
S20_N: U$2.D15 X-SOUTH.76
S20_P: U$2.D16 X-SOUTH.74
S21_N: U$2.B14 X-SOUTH.77
S21_P: U$2.B15 X-SOUTH.75
S22_N: U$2.D13 X-SOUTH.82
S22_P: U$2.D14 X-SOUTH.80
S23_N: U$2.A13 X-SOUTH.83
S23_P: U$2.A14 X-SOUTH.81
S24_N: U$2.C13 X-SOUTH.88
S24_P: U$2.C14 X-SOUTH.86
S25_N: U$2.B12 X-SOUTH.89
S25_P: U$2.B13 X-SOUTH.87
S26_N: U$2.D11 X-SOUTH.94
S26_P: U$2.D12 X-SOUTH.92
S27_N: U$2.A11 X-SOUTH.95
S27_P: U$2.A12 X-SOUTH.93
S28_N: U$2.C11 X-SOUTH.100
S28_P: U$2.C12 X-SOUTH.98
S29_N: U$2.B10 X-SOUTH.101
S29_P: U$2.B11 X-SOUTH.99
S30_N: U$2.C9 X-SOUTH.106
S30_P: U$2.C10 X-SOUTH.104
S31_N: U$2.B8 X-SOUTH.107
S31_P: U$2.B9 X-SOUTH.105
S32_N: U$2.D9 X-SOUTH.112
S32_P: U$2.D10 X-SOUTH.110
S33_N: U$2.A7 X-SOUTH.113
S33_P: U$2.A8 X-SOUTH.111
S34_N: U$2.C7 X-SOUTH.118
S34_P: U$2.C8 X-SOUTH.116
S35_N: U$2.B6 X-SOUTH.119
S35_P: U$2.B7 X-SOUTH.117
S36_N: U$2.D7 X-SOUTH.124
S36_P: U$2.D8 X-SOUTH.122
S37_N: U$2.A5 X-SOUTH.125
S37_P: U$2.A6 X-SOUTH.123
S38_N: X-SOUTH.130
S38_P: X-SOUTH.128
S39_N: U$4.6 X-SOUTH.131
S39_P: X-SOUTH.129
S_CHK_V: C5.1 C6.1 C7.1 R20.1 TP3.TP USE.8 USS.8 USW.8 X-SOUTH.8 X-SOUTH.10
S_I2C_V: X-SOUTH.135 X-SOUTH.137
S_REF: R20.2 TP4.TP U2.3 U2.4 USE.2 USE.5 USS.2 USS.5 USW.2 USW.5
S_SCK: X-SOUTH.144
S_SCL: X-SOUTH.143
S_SDA: X-SOUTH.141
S_SDI: X-SOUTH.140
S_SDO: X-SOUTH.142
S_SPI_V: X-SOUTH.134 X-SOUTH.136
S_VE: X-SOUTH.13 X-SOUTH.19 X-SOUTH.25 X-SOUTH.31 X-SOUTH.37 X-SOUTH.43
S_VE_CV: C11.1 R10.1 X-SOUTH.2
S_VE_OV: USE.7 X-SOUTH.1
S_VE_UV: USE.1 X-SOUTH.7
S_VS: C45.1 C46.1 C47.1 C48.1 C49.1 C72.1 C73.1 C74.1 C81.1 C82.1 C83.1 TP6.TP U$2.A30 U$2.D28 U$2.D30 U$2.G1 U$2.H28 X-SOUTH.49 X-SOUTH.55 X-SOUTH.61 X-SOUTH.67 X-SOUTH.73 X-SOUTH.79 X-SOUTH.85 X-SOUTH.91 X-SOUTH.97
S_VS_CV: C12.1 R13.1 X-SOUTH.4
S_VS_OV: USS.7 X-SOUTH.3
S_VS_UV: USS.1 X-SOUTH.9
S_VW: C90.1 U$4.1 U$4.3 X-SOUTH.103 X-SOUTH.109 X-SOUTH.115 X-SOUTH.121 X-SOUTH.127 X-SOUTH.133
S_VW_CV: C13.1 R16.1 X-SOUTH.6
S_VW_OV: USW.7 X-SOUTH.5
S_VW_UV: USW.1 X-SOUTH.11
SPI_CLK: U4.6 U$2.H29
SPI_EN: U6.9 U$2.F28
SPI_IN: U4.7 U$2.E28
SPI_OUT: U4.8 U$2.G28
SYS_RES_N: U5.10 U$2.F30
T_EXP1: U5.12 U$2.H30
T_EXP2: U6.10 U$2.E29
TDIG1: U5.9 U$2.G27
TDIG2: U6.11 U$2.G26
VRAMP1: C16.1 R23.1 U$2.G29
VRAMP2: C17.1 R23.2 U$2.F29
VTREF: C65.1 C91.2 R21.2 R24.1 U$2.B2 U$4.4
VTSIG: C66.1 R24.2 U$2.C2